# EAGLE board Daring Amberis (EAGLE 7.6.0)

Size 73.58 x 215.79 mm. Coordinates in mm from the lower left corner, seen from the top.
Outline: 0,0 56.82,0 56.82,53.33 0,53.33 0,0
Copper layers (1*16): Top 0.035mm / dielectric 1.5mm / Bottom 0.035mm
Design rules "default": minimum track width 10mil, minimum drill 24mil, track to track 8mil, track to pad 8mil, pad to pad 8mil, via to via 8mil, smd to smd 8mil, copper to edge 40mil, drill to drill 8mil, minimum pad ring 10mil, minimum via ring 8mil, stop-mask expansion 4mil, vias tented up to drill 0mil, thermal gap 10mil

## Footprints (pad centres in the part's own frame; a part is rotated, then mirrored left to right if it is on the bottom)
LED5MM = drill 0.813 octagon: A -1.27,0; K 1.27,0
0207/10 = drill 0.813 octagon: 1 -5.08,0; 2 5.08,0
TL1105 = drill 1 pad 1.676: 1 -2.25,3.25; 2 2.25,3.25; 3 -2.25,-3.25; 4 2.25,-3.25
ARDUINO_UNO = drill 1.016 pad 1.88: 0 63.5,50.8; 1 60.96,50.8; 2 58.42,50.8; 3 55.88,50.8; 3.3V 35.56,2.54; 4 53.34,50.8; 5 50.8,50.8; 5V 38.1,2.54; 6 48.26,50.8; 7 45.72,50.8; 8 41.656,50.8; 9 39.116,50.8; 10 36.576,50.8; 11 34.036,50.8; 12 31.496,50.8; 13 28.956,50.8; A0 50.8,2.54; A1 53.34,2.54; A2 55.88,2.54; A3 58.42,2.54; A4 60.96,2.54; A5 63.5,2.54; AREF 23.876,50.8; GND 26.416,50.8; GND. 43.18,2.54; GND.. 40.64,2.54; I/OREF 30.48,2.54; N/C 27.94,2.54; RESET 33.02,2.54; SCL 18.796,50.8; SDA 21.336,50.8; VIN 45.72,2.54 | hole 3.2: 66.04,7.62; 66.04,35.56; 15.24,50.8; 13.97,2.54

## Placement (x,y rotation side)
D1  [LED5MM]  5,22.78 0 top
D2  [LED5MM]  5,86.28 0 top
D3  [LED5MM]  5,149.78 0 top
D4  [LED5MM]  5,213.28 0 top
D5  [LED5MM]  5,225.98 0 top  (outside the outline)
D6  [LED5MM]  5,238.68 0 top  (outside the outline)
D7  [LED5MM]  5,276.78 0 top  (outside the outline)
D8  [LED5MM]  5,289.48 0 top  (outside the outline)
D9  [LED5MM]  5,302.18 0 top  (outside the outline)
D10  [LED5MM]  5,314.88 0 top  (outside the outline)
D11  [LED5MM]  5,327.58 0 top  (outside the outline)
D12  [LED5MM]  5,403.78 0 top  (outside the outline)
D13  [LED5MM]  5,416.48 0 top  (outside the outline)
D14  [LED5MM]  5,429.18 0 top  (outside the outline)
D15  [LED5MM]  5,441.88 0 top  (outside the outline)
D16  [LED5MM]  5,454.58 0 top  (outside the outline)
D17  [LED5MM]  5,467.28 0 top  (outside the outline)
D18  [LED5MM]  5,505.38 0 top  (outside the outline)
D19  [LED5MM]  5,518.08 0 top  (outside the outline)
R1  1k‎Ω  [0207/10]  5,35.48 0 top
R2  1k‎Ω  [0207/10]  5,60.88 0 top
R3  1k‎Ω  [0207/10]  5,111.68 0 top
R4  220‎Ω  [0207/10]  5,175.18 0 top
R5  220‎Ω  [0207/10]  5,187.88 0 top
R6  220‎Ω  [0207/10]  5,200.58 0 top
R7  10k‎Ω  [0207/10]  5,264.08 0 top  (outside the outline)
R8  1k‎Ω  [0207/10]  5,340.28 0 top  (outside the outline)
R9  1k‎Ω  [0207/10]  5,352.98 0 top  (outside the outline)
R10  1k‎Ω  [0207/10]  5,365.68 0 top  (outside the outline)
R11  1k‎Ω  [0207/10]  5,378.38 0 top  (outside the outline)
R12  1k‎Ω  [0207/10]  5,391.08 0 top  (outside the outline)
R14  1k‎Ω  [0207/10]  5,530.78 0 top  (outside the outline)
R15  1k‎Ω  [0207/10]  5,543.48 0 top  (outside the outline)
R16  1k‎Ω  [0207/10]  5,556.18 0 top  (outside the outline)
R17  1k‎Ω  [0207/10]  5,568.88 0 top  (outside the outline)
R18  1k‎Ω  [0207/10]  5,581.58 0 top  (outside the outline)
R19  1k‎Ω  [0207/10]  5,594.28 0 top  (outside the outline)
S1  [TL1105]  5,73.58 0 top
S2  [TL1105]  5,124.38 0 top
S3  [TL1105]  5,137.08 0 top
S4  [TL1105]  5,251.38 0 top  (outside the outline)
S5  [TL1105]  5,479.98 0 top  (outside the outline)
S6  [TL1105]  5,492.68 0 top  (outside the outline)
U1  [ARDUINO_UNO]  5,10.08 0 top
U2  [ARDUINO_UNO]  5,48.18 0 top
U3  [ARDUINO_UNO]  5,98.98 0 top
U4  [ARDUINO_UNO]  5,162.48 0 top

## Library data of the parts
D1-D19 R1-R12 R14-R19 S1-S6 U1-U4 = AUTODESK_CIRCUITS_BREADBOARD

## Nets
N$1: D1.K R1.2
N$2: R1.1 U1.GND..
N$3: D1.A U1.5V
N$4: R2.1 U2.5V
N$5: R2.2 S1.3
N$6: D2.A S1.4
N$7: D2.K U2.GND.
N$8: S1.2
N$9: S1.1
N$10: R3.1 U3.5V
N$11: R3.2 S2.3 S3.3
N$12: S2.2
N$13: S2.1
N$14: D3.A S2.4 S3.4
N$15: S3.2
N$16: S3.1
N$17: D3.K U3.GND.
N$18: R4.2 R5.2 R6.2 R7.2 U4.GND.
N$19: D4.K R4.1
N$20: D5.K R5.1
N$21: D6.K R6.1
N$22: D4.A U4.5
N$23: D5.A U4.4
N$24: D6.A U4.3
N$25: R7.1 S4.4 U4.2
N$26: S4.2
N$27: S4.1
N$28: D7.K R8.1
N$29: D8.K R9.1
N$30: D8.A D9.A U4.7
N$31: D9.K R10.1
N$32: D10.K R11.1
N$33: D10.A D11.A D12.A U4.8
N$34: R8.2 R9.2 R10.2 R11.2 R12.2 R14.2 R15.2 R16.2 R17.2 R18.2 R19.2 U4.GND..
N$35: D11.K R12.1
N$36: D12.K
N$37: D13.K
N$38: D13.A D14.A D15.A U4.9
N$39: D14.K D15.K R14.1
N$40: D16.K D17.K R15.1
N$41: D16.A D17.A U4.10
N$42: S6.4
N$43: R19.1 S6.2 U4.11
N$44: D18.A D19.A S4.3 S5.1 S6.1 U4.5V
N$45: S6.3
N$46: S5.4
N$47: R18.1 S5.2 U4.12
N$48: S5.3
N$49: D18.K R16.1
N$50: D19.K R17.1
N$51: D7.A U4.6

## Tracks (layer width: path | path; a pad name or v marks a point on that pad's centre or on a via)
N$1  (1 unrouted)
N$2  (1 unrouted)
N$3  (1 unrouted)
N$4  (1 unrouted)
N$5  (1 unrouted)
N$6  (1 unrouted)
N$7  (1 unrouted)
N$10  (1 unrouted)
N$11  (2 unrouted)
N$14  (2 unrouted)
N$17  (1 unrouted)
N$18  (4 unrouted)
N$19  (1 unrouted)
N$20  (1 unrouted)
N$21  (1 unrouted)
N$22  (1 unrouted)
N$23  (1 unrouted)
N$24  (1 unrouted)
N$25  (2 unrouted)
N$28  (1 unrouted)
N$29  (1 unrouted)
N$30  (2 unrouted)
N$31  (1 unrouted)
N$32  (1 unrouted)
N$33  (3 unrouted)
N$34  (11 unrouted)
N$35  (1 unrouted)
N$38  (3 unrouted)
N$39  (2 unrouted)
N$40  (2 unrouted)
N$41  (2 unrouted)
N$43  (2 unrouted)
N$44  (5 unrouted)
N$47  (2 unrouted)
N$49  (1 unrouted)
N$50  (1 unrouted)
N$51  (1 unrouted)